# Altium PCB NG_0036526167_Diplomski-rad_PCB.PcbDoc (part 1 of 2)
Units mm, origin at the board's own origin, x right, y up, seen from the top; angles counter-clockwise.
Board outline 100 x 90 mm, 4 copper layers (Top Layer, GND1, GND2, Bottom Layer), stack 1.586 mm thick; 152 components, 97 nets, 539 pads, 128 vias.
Unrouted connection lines stored in the file: 99.
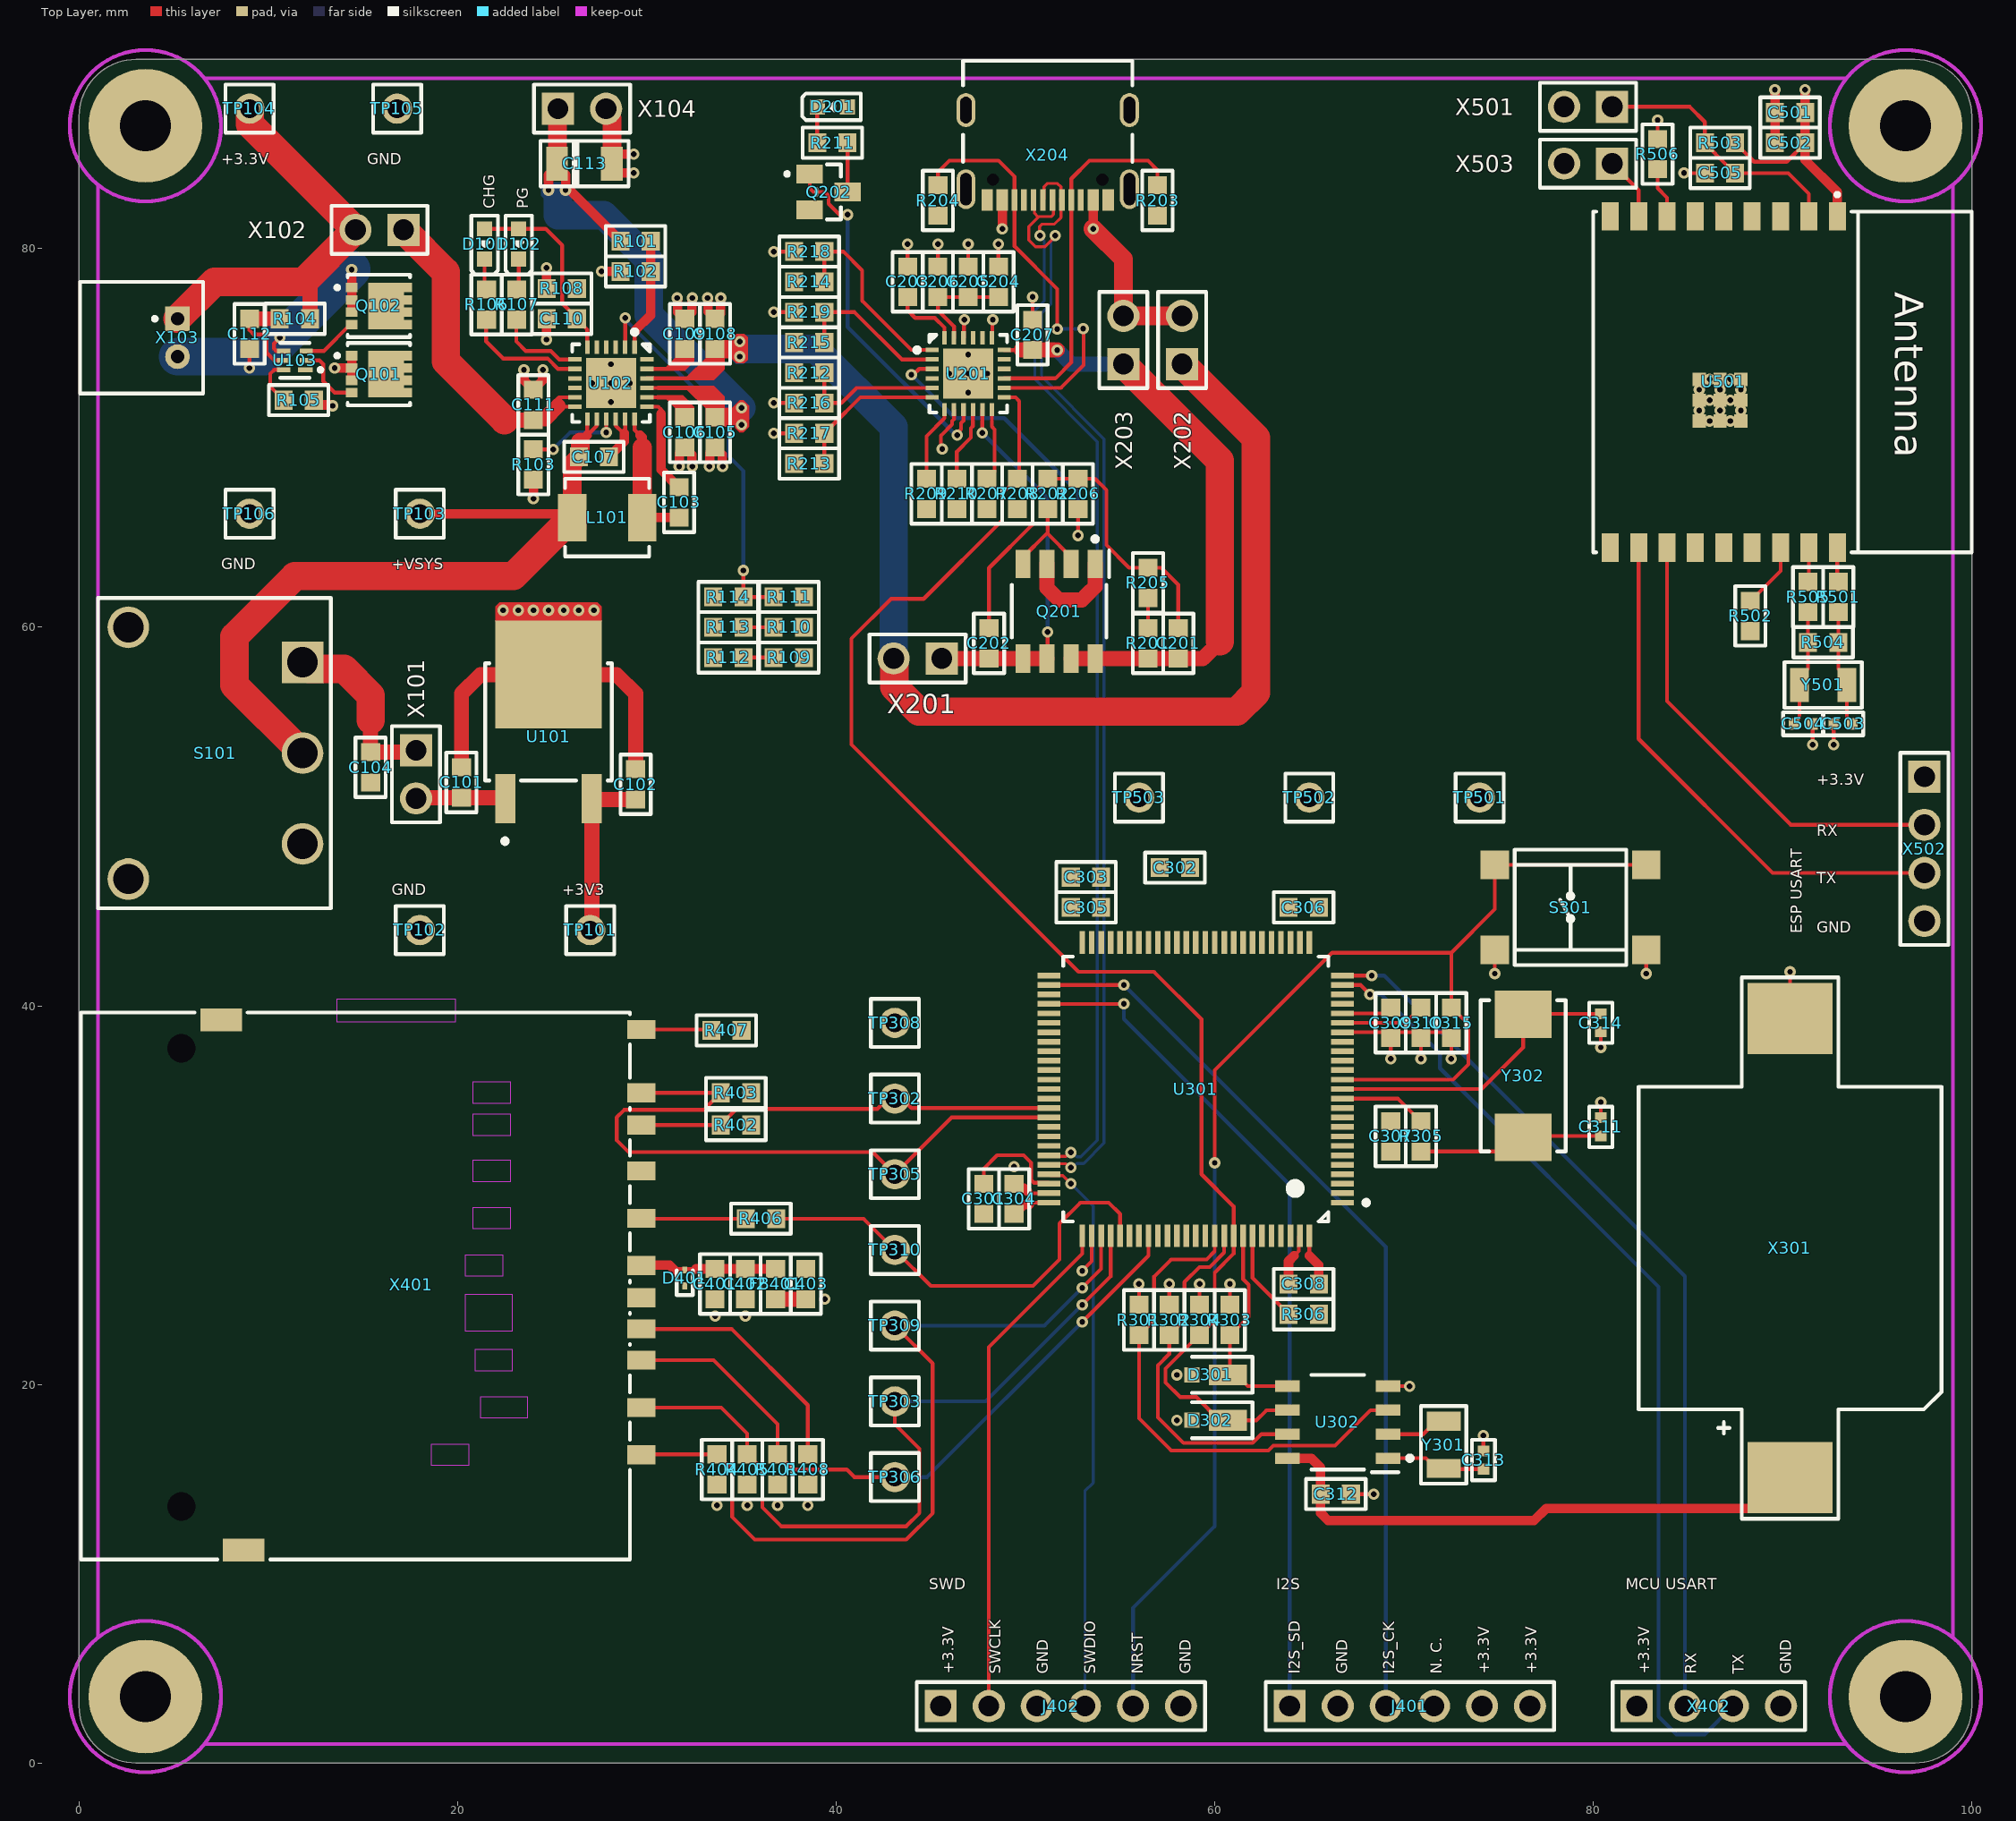
[diagram p0: Top Layer view]
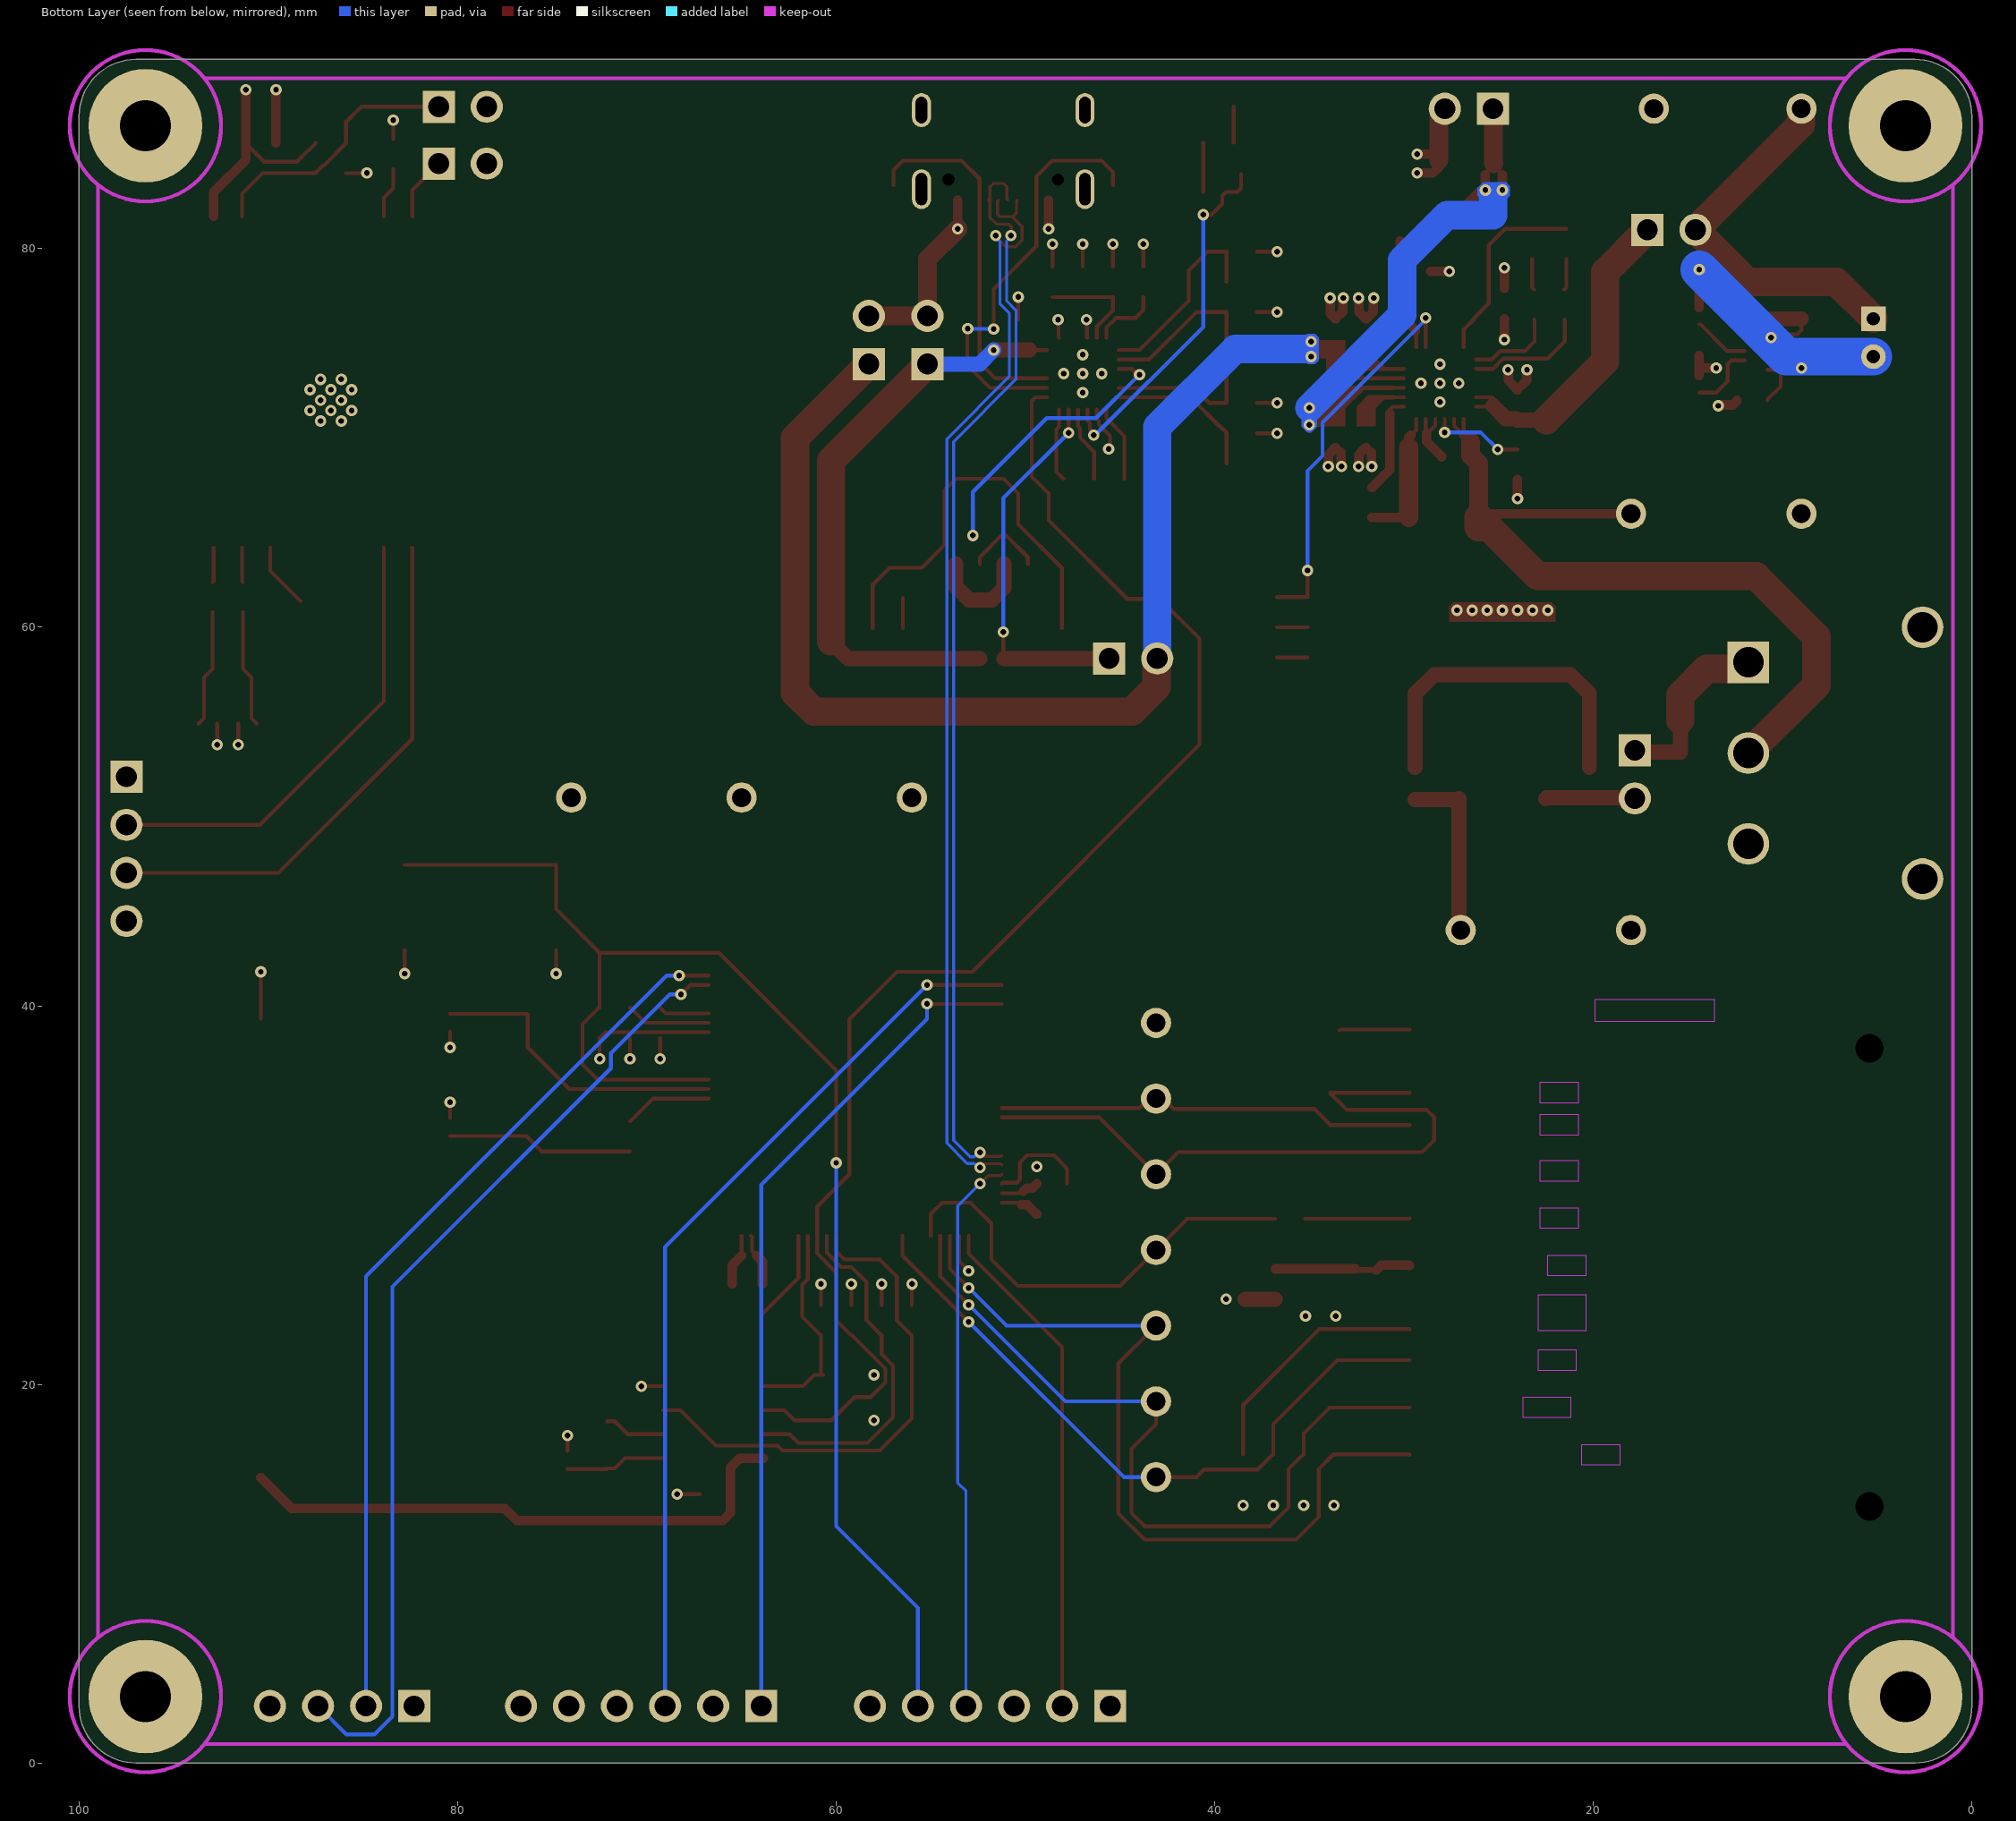
[diagram p1: Bottom Layer view, seen from below]
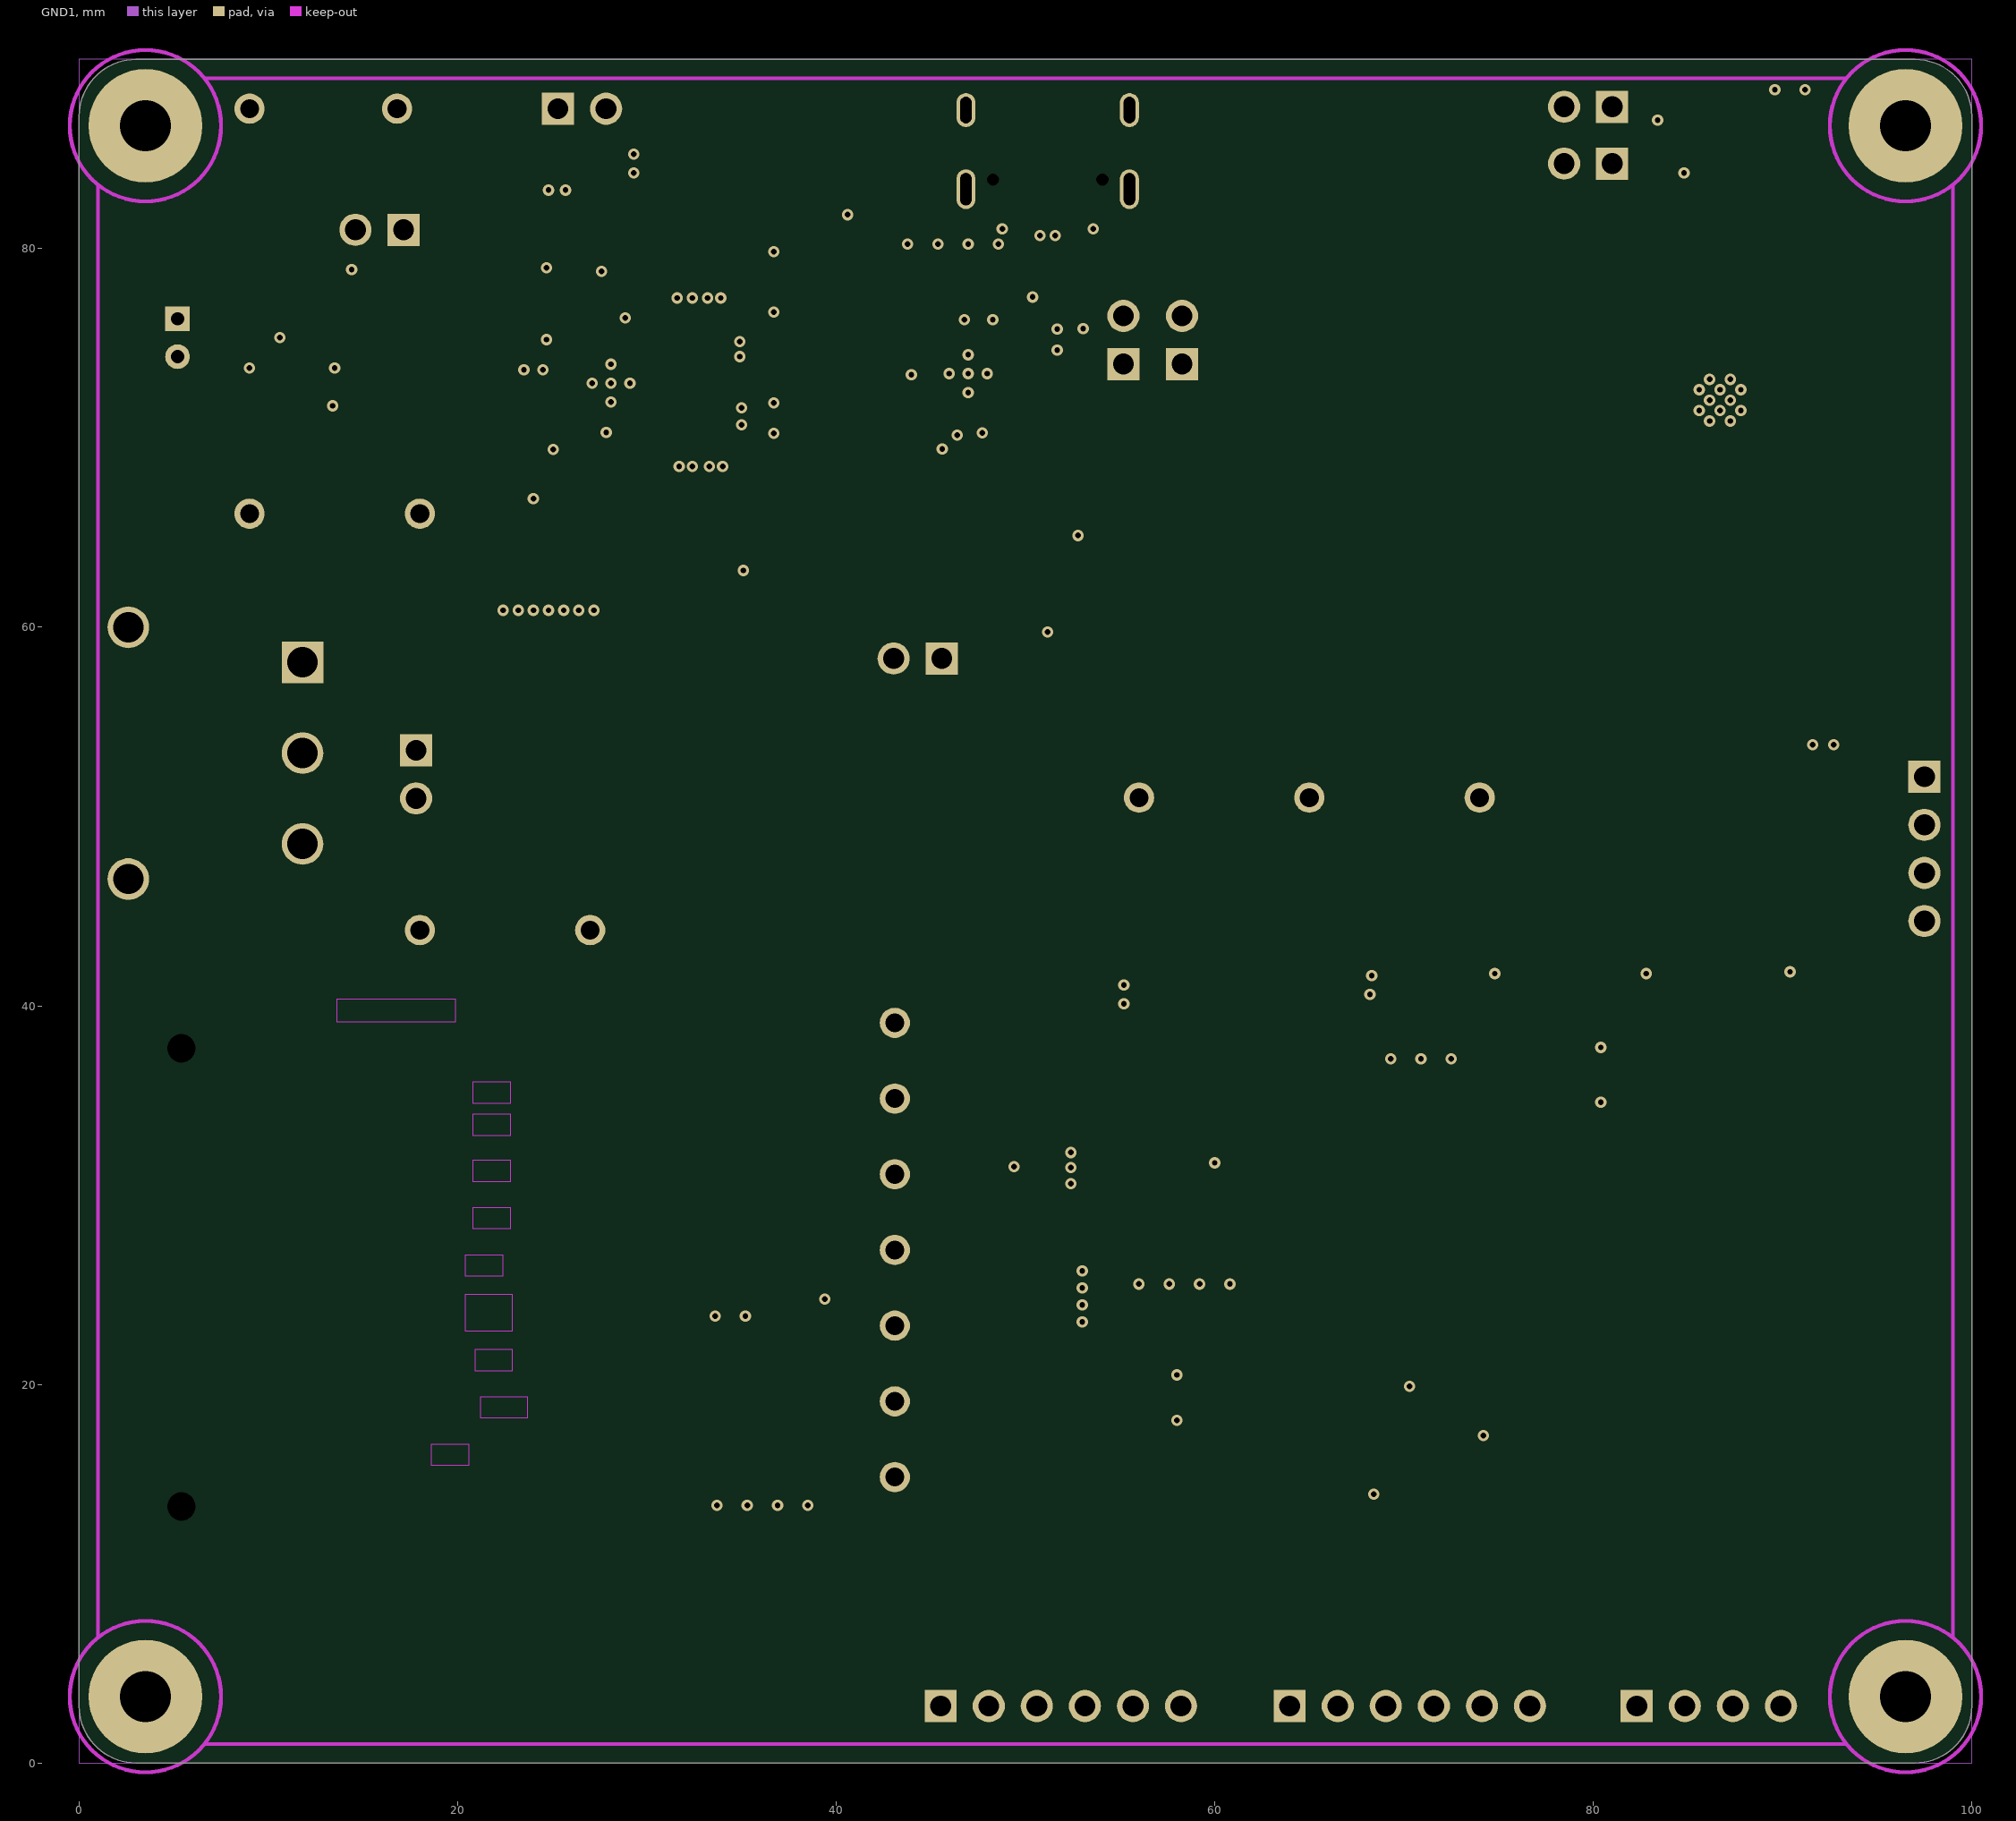
[diagram p2: GND1]
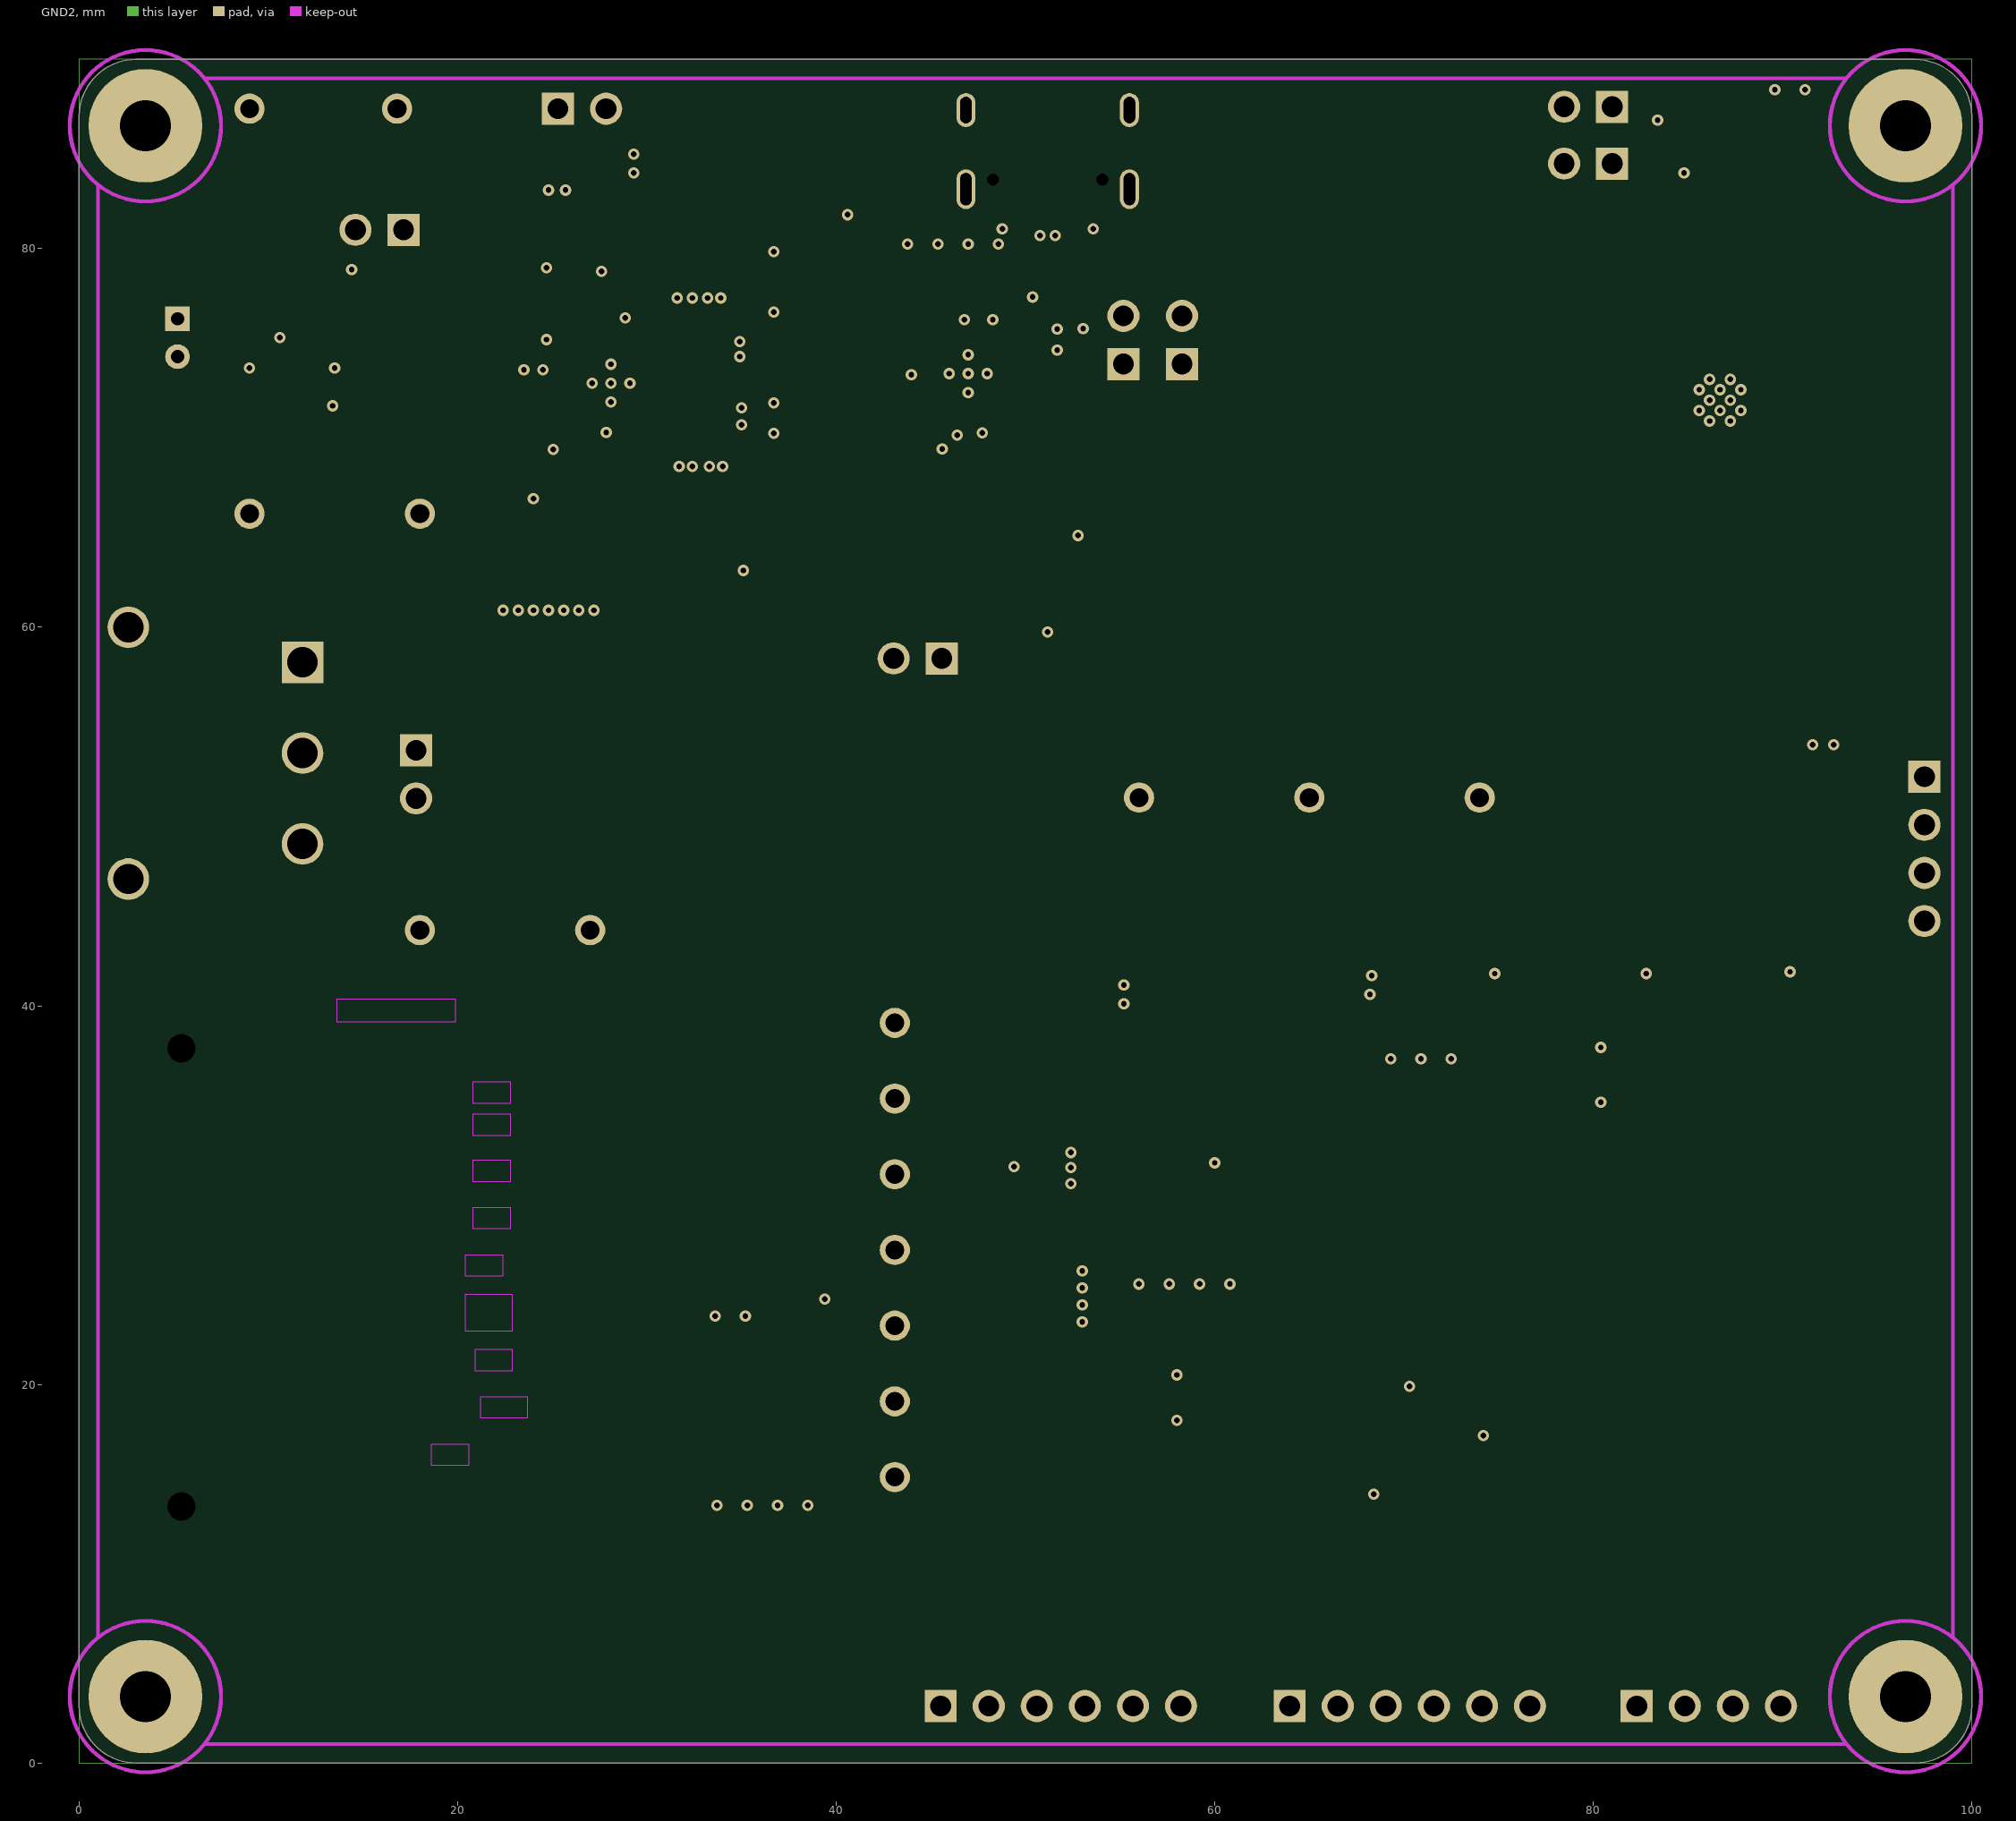
[diagram p3: GND2]
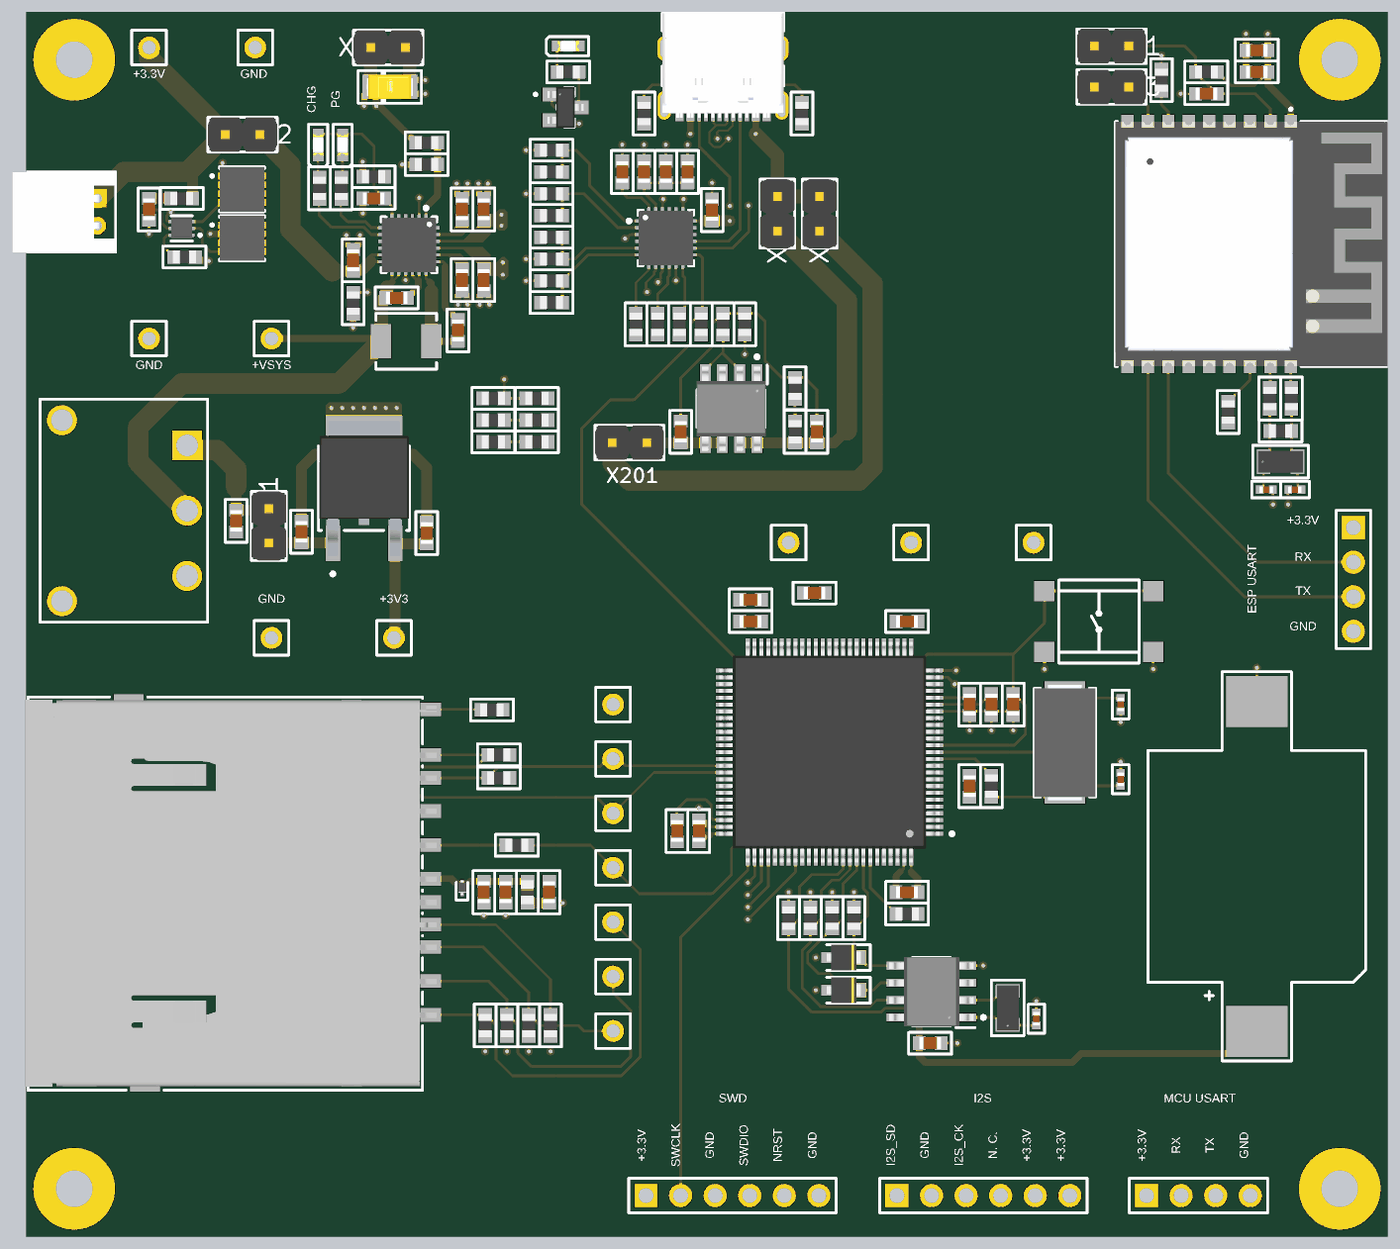
[diagram p5: 3D render of the assembled board from above, using the file's embedded part models]

## Layer stack, top to bottom
Top Solder: solder mask 0.0102, Solder Resist, Dk 0
Top Layer: signal copper 0.035
Dielectric 2: prepreg 0.2104, 7628*1, Dk 4.4
GND1: signal copper 0.0152
Dielectric 1: dielectric 1.065, FR-4, Dk 4.6
GND2: signal copper 0.0152
Dielectric 3: prepreg 0.2104, 7628*1, Dk 4.4
Bottom Layer: signal copper 0.035
Bottom Solder: solder mask 0.0102, Solder Resist, Dk 0

## Board outline
3,0 cw(c3,3) 0,3 0,87 cw(c3,87) 3,90 97,90 cw(c97,87) 100,87 100,3 cw(c97,3) 97,0

## Design rules (kind name [scope] priority, off if disabled: settings)
Clearance [All] p1: gap=0.2 ignorepadtopadclearanceinfootprint=FALSE except(0.127: SMDPad-SMDPad SMDPad-THPad SMDPad-Hole)
DiffPairsRouting [All] p1: maxlimit=0.254 minlimit=0.2 mostfreqgap=0.2 toplayer_minwidth=0.09 toplayer_maxwidth=0.381 toplayer_prefwidth=0.2 midlayer1_minwidth=0.09 midlayer1_maxwidth=0.381 midlayer1_prefwidth=0.2 midlayer2_minwidth=0.09 midlayer2_maxwidth=0.381 midlayer2_prefwidth=0.2 bottomlayer_minwidth=0.09 bottomlayer_maxwidth=0.381 bottomlayer_prefwidth=0.2 maxuncoupledlength=12.7
HoleSize ViaHoleSize [IsVia] p1: absolutevalues=TRUE maxlimit=0.6 minlimit=0.25 maxpercent=80.000 minpercent=20.000
HoleSize [All] p2: absolutevalues=TRUE maxlimit=6.3 minlimit=0.3 maxpercent=80.000 minpercent=20.000
HoleToHoleClearance ViaToViaClearance [IsVia vs IsVia] p1: gap=0.254 allowstackedmicrovias=TRUE
HoleToHoleClearance [All] p2: gap=0.5 allowstackedmicrovias=TRUE
MinimumAnnularRing MinimumAnnularRingVia [IsVia] p1: minimumring=0.1
MinimumAnnularRing [All] p2: minimumring=0.3
MinimumSolderMaskSliver [All] p1: minsoldermaskwidth=0.1
PolygonConnect [All] p1: connectstyle=Relief reliefconductorwidth=0.254 reliefentries=4 polygonreliefangle="90 Angle" airgapwidth=0.254
RoutingVias [All] p1: holewidth=0.45 width=0.3 viastyle="Through Hole" minholewidth=0.25 minwidth=0.15 maxholewidth=0.75 maxwidth=0.6
SilkToSilkClearance [All] p1: silktosilkclearance=0.2
SilkToSolderMaskClearance [IsPad] p1: minsilkscreentomaskgap=0.15 clearancetoexposedcopper=TRUE
SolderMaskExpansion [All] p1: expansion=0.038 istentingtop=FALSE
Width [All] p1: maxlimit=2 minlimit=0.09 preferedwidth=0.2
24 further rules are at their usual default settings.

## Classes and differential pairs
differential pair USB_OTG_FS: +USB_OTG_FS_P -USB_OTG_FS_N

## Components (designator, comment, footprint, x,y, rotation, side; value= is the part's Value field where it differs from the comment)
C101 "10u" CAPC0603 20.2,51.8 r270 top
C102 "10u" CAPC0603 29.4,51.7 r270 top
C103 "10n" CAPC0603 31.7,66.6 r270 top
C104 "47u" CAPC0603 15.4,52.6 r90 top
C105 "1u" CAPC0603 33.6,70.3 r90 top
C106 "4u7" CAPC0603 32,70.3 r90 top
C107 "10u" CAPC0603 27.2,69 r180 top
C108 "1u" CAPC0603 33.6,75.5 r270 top
C109 "4u7" CAPC0603 32,75.5 r270 top
C110 "1u" CAPC0603 25.5,76.3 r0 top
C111 "1u" CAPC0603 24,71.75 r270 top
C112 "100n" CAPC0603 9,75.5 r90 top
C113 "10u" CAPCP1206 26.7,84.5 r0 top
C201 "4u7" CAPC0603 58.075,59.15 r270 top
C202 "100n" CAPC0603 48.075,59.15 r270 top
C203 "1u" CAPC0603 43.775,78.25 r270 top
C204 "1u" CAPC0603 48.575,78.25 r270 top
C205 "100n" CAPC0603 46.975,78.25 r270 top
C206 "100n" CAPC0603 45.375,78.25 r270 top
C207 "3u3" CAPC0603 50.375,75.45 r270 top
C301 "2u2" CAPC0603 47.8,29.8 r90 top
C302 "2u2" CAPC0603 57.9,47.3 r180 top
C303 "4u7" CAPC0603 53.2,46.8 r180 top
C304 "100n" CAPC0603 49.4,29.8 r270 top
C305 "100n" CAPC0603 53.2,45.2 r180 top
C306 "100n" CAPC0603 64.7,45.2 r180 top
C307 "100n" CAPC0603 69.3,33.1 r90 top
C308 "100n" CAPC0603 64.7,25.3 r0 top
C309 "1u" CAPC0603 69.3,39.1 r90 top
C310 "100n" CAPC0603 70.9,39.1 r90 top
C311 "12p" CAPC0402 80.4,33.6 r270 top value=CAPC0402
C312 "100n" CAPC0603 66.4,14.2 r180 top
C313 "4p02" CAPC0402 74.2,16 r270 top value=CAPC0402
C314 "12p" CAPC0402 80.4,39.1 r90 top value=CAPC0402
C315 "100n" CAPC0603 72.5,39.1 r90 top
C401 "100n" CAPC0603 33.6,25.3 r90 top
C402 "2u2" CAPC0603 35.2,25.3 r90 top
C403 "C0603" CAPC0603 38.4,25.3 r270 top
C501 "10u" CAPC0603 90.4,87.2 r180 top
C502 "100n" CAPC0603 90.4,85.6 r180 top
C503 "12p" CAPC0402 93.2,54.9 r0 top value=CAPC0402
C504 "12p" CAPC0402 91.1,54.9 r180 top value=CAPC0402
C505 "1u" CAPC0603 86.7,84 r0 top
D101 "LTST-C194KGKT" LED0603 21.425,80.25 r90 top value=Green
D102 "LTST-C194KGKT" LED0603 23.225,80.25 r90 top value=Green
D201 "HL-PST-1608S9AC-04" LED0603 39.8,87.5 r0 top value=RED
D301 "PD3Z284C2V7-7" PowerDI323 59.75,20.5 r180 top
D302 "PD3Z284C2V7-7" PowerDI323 59.75,18.1 r180 top
D401 "ESD9B5.0ST5G" DIOC8060X37 32,25.62 r90 top
FB401 "120R" FBC0603 36.8,25.3 r270 top
J401 "HEADER6X1" HDR6W64P254_6X1_1524X254X1150 63.96,3 r90 top
J402 "HEADER6X1" HDR6W64P254_6X1_1524X254X1150 45.52,3 r90 top
L101 "2u2" INDM4145X18 27.9,65.8 r180 top value=2.2uH
Q101 "CSD16406Q3" TRANS_CSD16406Q3 15.835,73.375 r270 top
Q102 "CSD16406Q3" TRANS_CSD16406Q3 15.835,76.975 r270 top
Q201 "DMP3098LSD-13" SOIC127P620X175-8 51.775,60.85 r270 top
Q202 "BSS138" SOT190P240X290-3 39.6,83 r270 top
R101 "31k6" RESC0603 29.4,80.4 r180 top value=RES0603
R102 "10k" RESC0603 29.4,78.8 r180 top value=RES0603
R103 "160R" RESC0603 24,68.6 r270 top value=RES0603
R104 "330R" RESC0603 11.4,76.3 r0 top value=RES0603
R105 "2k2" RESC0603 11.6,72 r180 top value=RES0603
R106 "330R" RESC0603 21.525,77.05 r90 top value=RES0603
R107 "330R" RESC0603 23.125,77.05 r90 top value=RES0603
R108 "470R" RESC0603 25.5,77.9 r0 top value=RES0603
R109 "10k" RESC0603 37.5,58.4 r180 top value=RES0603
R110 "10k" RESC0603 37.5,60 r180 top value=RES0603
R111 "10k" RESC0603 37.5,61.6 r180 top value=RES0603
R112 "10k" RESC0603 34.3,58.4 r180 top value=RES0603
R113 "10k" RESC0603 34.3,60 r180 top value=RES0603
R114 "10k" RESC0603 34.3,61.6 r180 top value=RES0603
R201 "10k" RESC0603 56.475,59.15 r270 top value=RES0603
R202 "2k2" RESC0603 51.175,67.05 r270 top value=RES0603
R203 "5k1" RESC0603 56.975,82.55 r90 top value=RES0603
R204 "5k1" RESC0603 45.375,82.55 r90 top value=RES0603
R205 "10k" RESC0603 56.475,62.35 r270 top value=RES0603
R206 "2k2" RESC0603 52.775,67.049 r90 top value=RES0603
R207 "2k2" RESC0603 47.975,67.05 r270 top value=RES0603
R208 "2k2" RESC0603 49.575,67.05 r270 top value=RES0603
R209 "2k2" RESC0603 44.775,67.05 r270 top value=RES0603
R210 "2k2" RESC0603 46.375,67.05 r270 top value=RES0603
R211 "330R" RESC0603 39.8,85.6 r180 top value=RES0603
R212 "5k1" RESC0603 38.575,73.45 r180 top value=RES0603
R213 "5k1" RESC0603 38.575,68.65 r180 top value=RES0603
R214 "0R0" RESC0603 38.575,78.25 r180 top value=RES0603
R215 "0R0" RESC0603 38.575,75.05 r180 top value=RES0603
R216 "1k" RESC0603 38.575,71.85 r0 top value=RES0603
R217 "2k4" RESC0603 38.575,70.25 r0 top value=RES0603
R218 "0R0" RESC0603 38.575,79.85 r0 top value=RES0603
R219 "0R0" RESC0603 38.575,76.65 r0 top value=RES0603
R301 "2k2" RESC0603 56,23.4 r90 top value=RES0603
R302 "2k2" RESC0603 57.6,23.4 r90 top value=RES0603
R303 "2k2" RESC0603 60.8,23.4 r90 top value=RES0603
R304 "2k2" RESC0603 59.2,23.4 r90 top value=RES0603
R305 "0R0" RESC0603 70.9,33.1 r90 top value=RES0603
R306 "10k" RESC0603 64.7,23.7 r180 top value=RES0603
R401 "10k" RESC0603 36.9,15.5 r270 top value=RES0603
R402 "10k" RESC0603 34.7,33.7 r0 top value=RES0603
R403 "10k" RESC0603 34.7,35.4 r0 top value=RES0603
R404 "10k" RESC0603 33.7,15.5 r270 top value=RES0603
R405 "10k" RESC0603 35.3,15.5 r270 top value=RES0603
R406 "49R9" RESC0603 36.025,28.75 r180 top value=RES0603
R407 "DNP" RESC0603 34.2,38.7 r180 top value=RES0603
R408 "1M" RESC0603 38.5,15.5 r90 top value=RES0603
R501 "0R" RESC0603 92.95,61.6 r90 top value=RES0603
R502 "10k" RESC0603 88.3,60.6 r270 top value=RES0603
R503 "10k" RESC0603 86.7,85.6 r0 top value=RES0603
R504 "DNP" RESC0603 92.15,59.2 r180 top value=RES0603
R505 "0R" RESC0603 91.35,61.6 r90 top value=RES0603
R506 "10k" RESC0603 83.4,85 r90 top value=RES0603
S101 "SS-12D11L3" SW_SS-12D11L3 11.8,58.15 r270 top
S301 "SPST" SW_TSA063G60-250 78.8,45.2 r0 top value=TSA063G60-250
TP101 "TP" TESTPOINT 27,44 r90 top value=5001
TP102 "TP" TESTPOINT 18,44 r90 top value=5001
TP103 "TP" TESTPOINT 18,66 r90 top value=5001
TP104 "TP" TESTPOINT 9,87.4 r90 top value=5001
TP105 "TP" TESTPOINT 16.8,87.4 r90 top value=5001
TP106 "TP" TESTPOINT 9,66 r90 top value=5001
TP302 "TP" TESTPOINT 43.1,35.1 r90 top value=5001
TP303 "TP" TESTPOINT 43.1,19.1 r90 top value=5001
TP305 "TP" TESTPOINT 43.1,31.1 r90 top value=5001
TP306 "TP" TESTPOINT 43.1,15.1 r90 top value=5001
TP308 "TP" TESTPOINT 43.1,39.1 r90 top value=5001
TP309 "TP" TESTPOINT 43.1,23.1 r90 top value=5001
TP310 "TP" TESTPOINT 43.1,27.1 r0 top value=5001
TP501 "TP" TESTPOINT 74,51 r90 top value=5001
TP502 "TP" TESTPOINT 65,51 r90 top value=5001
TP503 "TP" TESTPOINT 56,51 r90 top value=5001
U101 "AP7363-33D-13" TO457X991X229-3 24.8,55 r0 top
U102 "BQ24166RGER" QFN50P410X410X100-24EP 28.1,72.9 r270 top
U103 "BQ29700DSER" WSON50P150X150X80-6 11.4,74.1 r180 top
U201 "CYPD3177-24LQXQT" QFN50P410X410X100-24EP 46.975,73.4 r0 top
U301 "STM32F746VGT6" QFP50P1600X1600X160-100 59,35.6 r180 top
U302 "PCF8563T/5,518" SOIC127P610X175-8 66.5,18 r180 top
U501 "ESP32-C3-WROOM-02-N4" ESP32-C3-WROOM-02-N4 86.9,72.96 r270 top
X101 "HEADER2X1" HDRV2W64P254_2X1_508X254X1150 17.8,53.5 r270 top value=X6521WV-2x01H-C60D30
X102 "HEADER2X1" HDRV2W64P254_2X1_508X254X1150 17.14,81 r180 top value=X6521WV-2x01H-C60D30
X103 "S2B-PH-K-S" JST_S2B-PH-K-S 5.2,76.3 r180 top
X104 "HEADER2X1" HDRV2W64P254_2X1_508X254X1150 25.3,87.4 r0 top value=X6521WV-2x01H-C60D30
X201 "HEADER2X1" HDRV2W64P254_2X1_508X254X1150 45.576,58.351 r180 top value=X6521WV-2x01H-C60D30
X202 "HEADER2X1" HDRV2W64P254_2X1_508X254X1150 58.275,73.91 r90 top value=X6521WV-2x01H-C60D30
X203 "HEADER2X1" HDRV2W64P254_2X1_508X254X1150 55.175,73.91 r90 top value=X6521WV-2x01H-C60D30
X204 "HC-TYPE-C-16P-01A-R" GCT_USB4105-GF-A 51.175,86.075 r180 top
X301 "CR1632" BAT_BS-16-B4AA006-R 90.4,27.2 r270 top value=BS-16-B4AA006-R
X401 "10067847-001RLF" SD_10067847-001RLF 20.325,25.65 r270 top
X402 "HEADER4X1" HDRV4W64P254_4X1_1016X254X1150 82.3,3 r0 top value=4X1
X501 "HEADER2X1" HDRV2W64P254_2X1_508X254X1150 81,87.5 r180 top value=X6521WV-2x01H-C60D30
X502 "HEADER4X1" HDRV4W64P254_4X1_1016X254X1150 97.5,52.1 r270 top value=4X1
X503 "HEADER2X1" HDRV2W64P254_2X1_508X254X1150 81,84.5 r180 top value=X6521WV-2x01H-C60D30
Y301 "32.768kHz" XTAL320X150X80 72.1,16.8 r90 top
Y302 "8MHz" XTAL800X450X180 76.3,36.3 r270 top
Y501 "32.768kHz" XTAL320X150X80 92.15,56.95 r0 top

## Footprints (in the part's own frame and the unit in brackets; to place one, negate y for a bottom-side part, rotate by r counter-clockwise, add the part's x,y. Pads: shape width x height; smd on the part's side, far side on the other; paste and mask are expansions set on the pad)
BAT_BS-16-B4AA006-R [mm] "Generic description"
  rect 3.75x4.5 smd mask+0.05: 1(12.125,0) 2(-12.125,0)
  silkscreen extent -14.3,-8 14.3,8
CAPC0402 [mm]
  rect 0.57x0.62 smd mask+0.05: 1(-0.48,0) 2(0.48,0)
  silkscreen extent -1.06,-0.61 1.06,0.61, body extent -0.5,-0.25 0.5,0.25, height 0.55
CAPC0603 [mm]
  rect 0.95x1 smd mask+0.05: 1(-0.8,0) 2(0.8,0)
  silkscreen extent -1.58,-0.8 1.58,0.8, body extent -0.8,-0.45 0.8,0.45, height 0.8
CAPCP1206 [mm] "Generic description"
  rect 1.15x1.8 smd mask+0.05: 1(-1.45,0) 2(1.45,0)
  silkscreen extent -2.32,-1.2 2.32,1.2, body extent -1.7,-0.9 1.7,0.9, height 1.81
DIOC8060X37 [mm] "SOD-923"
  rect 0.36x0.25 smd mask+0.05: 1(-0.42,0) 2(0.42,0)
  silkscreen extent -0.9,-0.43 0.4,0.43, body extent -0.5,-0.3 0.5,0.3, height 0.4
ESP32-C3-WROOM-02-N4 [mm] "Footprint for ESP32-C3-WROOM-02-N4 modem"
  rect 1.5x0.9 smd mask+0.05: 1(-8.75,6) 2(-8.75,4.5) 3(-8.75,3) 4(-8.75,1.5) 5(-8.75,0) 6(-8.75,-1.5) 7(-8.75,-3) 8(-8.75,-4.5) 9(-8.75,-6) 10(8.75,-6) 11(8.75,-4.5) 12(8.75,-3) 13(8.75,-1.5) 14(8.75,0) 15(8.75,1.5) 16(8.75,3) 17(8.75,4.5) 18(8.75,6)
  rect 0.7x0.7 smd mask+0.05: 19(-0.14,0.9) 19(-0.14,-0.2) 19(-0.14,-1.3) 19(0.96,0.9) 19(0.96,-0.2) 19(0.96,-1.3) 19(2.06,-0.2) 19(2.06,0.9) 19(2.06,-1.3)
  Top Layer pour cut-out: -9,7.1 9,7.1 9,13.1 -9,13.1
  GND1 pour cut-out: -9,7.1 9,7.1 9,13.1 -9,13.1
  GND2 pour cut-out: -9,7.1 9,7.1 9,13.1 -9,13.1
  Bottom Layer pour cut-out: -9,7.1 9,7.1 9,13.1 -9,13.1
  silkscreen extent -10,-6.9 9,13.1, body extent -9,-6.9 9,13.1, height 3.35
FBC0603 [mm]
  rect 0.95x1 smd mask+0.05: 1(-0.8,0) 2(0.8,0)
  silkscreen extent -1.58,-0.8 1.58,0.8, body extent -0.88,-0.47 0.88,0.47, height 0.94
GCT_USB4105-GF-A [mm] "CONN USB 2.0 TYPE C"
  round 0.5 hole 0.65 unplated mask+0.102: 0(-2.89,2.428) 0(2.89,2.428)
  oval 1x1.8 hole 0.6 slot 1.4 at 90 deg mask+0.05: 1(-4.32,-1.252) 1(4.32,-1.252)
  oval 1x2.1 hole 0.6 slot 1.7 at 90 deg mask+0.05: 1(-4.32,2.927) 1(4.32,2.927)
  rect 0.6x1.15 smd mask+0.05: A1-B12(-3.2,3.503) A4-B9(-2.4,3.503) B1-A12(3.2,3.503) B4-A9(2.4,3.503)
  rect 0.3x1.15 smd mask+0.05: A5(-1.25,3.503) A6(-0.25,3.503) A7(0.25,3.503) A8(1.25,3.503) B5(1.75,3.503) B6(0.75,3.503) B7(-0.75,3.503) B8(-1.75,3.503)
  silkscreen extent -4.47,-3.85 4.47,1.48, body extent -4.47,-3.85 4.47,3.85, height 3.26
HDR6W64P254_6X1_1524X254X1150 [mm] "Pin header 6X1 right angle"
  rect 1.7x1.7 hole 1.1 mask+0.05: 1(0,0)
  round 1.7 hole 1.1 mask+0.05: 2(0,-2.54) 3(0,-5.08) 4(0,-7.62) 5(0,-10.16) 6(0,-12.7)
  silkscreen extent -1.27,-13.97 1.27,1.27
HDRV2W64P254_2X1_508X254X1150 [mm] "Generic description"
  rect 1.7x1.7 hole 1.1 mask+0.05: 1(0,0)
  round 1.7 hole 1.1 mask+0.05: 2(2.54,0)
  silkscreen extent -1.27,-1.27 3.81,1.27, body extent -1.27,-1.27 3.81,1.27, height 8.54
HDRV4W64P254_4X1_1016X254X1150 [mm] "Generic description"
  rect 1.7x1.7 hole 1.1 mask+0.05: 1(0,0)
  round 1.7 hole 1.1 mask+0.05: 2(2.54,0) 3(5.08,0) 4(7.62,0)
  silkscreen extent -1.27,-1.27 8.89,1.27
INDM4145X18 [mm]
  rect 1.5x2.5 smd mask+0.05: 1(-1.85,0) 2(1.85,0)
  silkscreen extent -2.22,-2.05 2.22,2.05
JST_S2B-PH-K-S [mm] "Generic description"
  rect 1.3x1.3 hole 0.7 mask+0.05: 1(0,0)
  round 1.3 hole 0.7 mask+0.05: 2(0,2)
  silkscreen extent -1.35,-1.95 5.15,3.95, body extent -1.35,-1.95 6.25,3.95, height 4.8
LED0603 [mm] "0603 Footprint for Light Emitting diodes"
  rect 0.8x0.8 smd mask+0.05: 1(-0.8,0) 2(0.8,0)
  silkscreen extent -1.6,-0.7 1.5,0.7, body extent -0.8,-0.4 0.8,0.4, height 0.7
PowerDI323 [mm] "PowerDI323"
  rect 2x1.1 smd paste-0.025 mask+0.05: 1(-0.95,0)
  rect 0.8x0.8 smd mask+0.05: 2(0.95,0)
  silkscreen extent -2.25,-0.95 0.95,0.95, body extent -1.55,-0.95 0.95,0.95, height 0.65
QFN50P410X410X100-24EP [mm] "Generic description"
  rect 0.7x0.24 smd mask+0.05: 1(-1.9,1.25) 2(-1.9,0.75) 3(-1.9,0.25) 4(-1.9,-0.25) 5(-1.9,-0.75) 6(-1.9,-1.25) 13(1.9,-1.25) 14(1.9,-0.75) 15(1.9,-0.25) 16(1.9,0.25) 17(1.9,0.75) 18(1.9,1.25)
  rect 0.24x0.7 smd mask+0.05: 7(-1.25,-1.9) 8(-0.75,-1.9) 9(-0.25,-1.9) 10(0.25,-1.9) 11(0.75,-1.9) 12(1.25,-1.9) 19(1.25,1.9) 20(0.75,1.9) 21(0.25,1.9) 22(-0.25,1.9) 23(-0.75,1.9) 24(-1.25,1.9)
  rect 2.65x2.65 smd paste-2539.97 mask+0.05: 25(0,0)
  silkscreen extent -2.8,-2.05 2.05,2.05, body extent -2,-2 2,2, height 1
QFP50P1600X1600X160-100 [mm] "Low-profile quad flat package, 100 pins"
  rect 1.2x0.3 smd mask+0.05: 1(-7.75,6) 2(-7.75,5.5) 3(-7.75,5) 4(-7.75,4.5) 5(-7.75,4) 6(-7.75,3.5) 7(-7.75,3) 8(-7.75,2.5) 9(-7.75,2) 10(-7.75,1.5) 11(-7.75,1) 12(-7.75,0.5) 13(-7.75,0) 14(-7.75,-0.5) 15(-7.75,-1) 16(-7.75,-1.5) 17(-7.75,-2) 18(-7.75,-2.5) 19(-7.75,-3) 20(-7.75,-3.5) 21(-7.75,-4) 22(-7.75,-4.5) 23(-7.75,-5) 24(-7.75,-5.5) 25(-7.75,-6) 51(7.75,-6) 52(7.75,-5.5) 53(7.75,-5) 54(7.75,-4.5) 55(7.75,-4) 56(7.75,-3.5) 57(7.75,-3) 58(7.75,-2.5) 59(7.75,-2) 60(7.75,-1.5) 61(7.75,-1) 62(7.75,-0.5) 63(7.75,0) 64(7.75,0.5) 65(7.75,1) 66(7.75,1.5) 67(7.75,2) 68(7.75,2.5) 69(7.75,3) 70(7.75,3.5) 71(7.75,4) 72(7.75,4.5) 73(7.75,5) 74(7.75,5.5) 75(7.75,6)
  rect 0.3x1.2 smd mask+0.05: 26(-6,-7.75) 27(-5.5,-7.75) 28(-5,-7.75) 29(-4.5,-7.75) 30(-4,-7.75) 31(-3.5,-7.75) 32(-3,-7.75) 33(-2.5,-7.75) 34(-2,-7.75) 35(-1.5,-7.75) 36(-1,-7.75) 37(-0.5,-7.75) 38(0,-7.75) 39(0.5,-7.75) 40(1,-7.75) 41(1.5,-7.75) 42(2,-7.75) 43(2.5,-7.75) 44(3,-7.75) 45(3.5,-7.75) 46(4,-7.75) 47(4.5,-7.75) 48(5,-7.75) 49(5.5,-7.75) 50(6,-7.75) 76(6,7.75) 77(5.5,7.75) 78(5,7.75) 79(4.5,7.75) 80(4,7.75) 81(3.5,7.75) 82(3,7.75) 83(2.5,7.75) 84(2,7.75) 85(1.5,7.75) 86(1,7.75) 87(0.5,7.75) 88(0,7.75) 89(-0.5,7.75) 90(-1,7.75) 91(-1.5,7.75) 92(-2,7.75) 93(-2.5,7.75) 94(-3,7.75) 95(-3.5,7.75) 96(-4,7.75) 97(-4.5,7.75) 98(-5,7.75) 99(-5.5,7.75) 100(-6,7.75)
  silkscreen extent -9.1,-7 7,7, body extent -8.1,-8.1 8.1,8.1, height 1.6
RESC0603 [mm] "Generic description"
  rect 0.95x1 smd mask+0.05: 1(-0.8,0) 2(0.8,0)
  silkscreen extent -1.58,-0.8 1.58,0.8, body extent -0.85,-0.47 0.85,0.47, height 0.56
SD_10067847-001RLF [mm] "SD card connector"
  round 1 hole 1.5 unplated: 0(-12.1,-14.925) 0(12.1,-14.925)
  rect 1x1.5 smd mask+0.05: 1(6.875,9.375) 2(4.375,9.375) 3(1.075,9.375) 4(-0.625,9.375) 5(-3.125,9.375) 6(-5.625,9.375) 7(-8.05,9.375) 8(-9.75,9.375) 9(9.375,9.375) 10(2.725,9.375) 11(-13.1,9.375)
  rect 1.2x2.2 smd mask+0.05: 12(-13.6,-12.825) 13(14.4,-11.625)
  Keep-Out Layer region: -10.31,0.475 -9.21,0.475 -9.21,2.475 -10.31,2.475
  Keep-Out Layer region: -8.61,0.475 -7.51,0.475 -7.51,2.475 -8.61,2.475
  Keep-Out Layer region: -6.18,0.475 -5.08,0.475 -5.08,2.475 -6.18,2.475
  Keep-Out Layer region: -3.68,0.475 -2.58,0.475 -2.58,2.475 -3.68,2.475
  Keep-Out Layer region: -1.18,0.075 -0.08,0.075 -0.08,2.075 -1.18,2.075
  Keep-Out Layer region: 3.82,0.575 4.92,0.575 4.92,2.575 3.82,2.575
  Keep-Out Layer region: 6.32,0.875 7.42,0.875 7.42,3.375 6.32,3.375
  Keep-Out Layer region: -14.7,-6.725 -13.5,-6.725 -13.5,-0.425 -14.7,-0.425
  Keep-Out Layer region: 8.82,-1.725 9.92,-1.725 9.92,0.275 8.82,0.275
  Keep-Out Layer region: 0.92,0.075 2.82,0.075 2.82,2.575 0.92,2.575
  silkscreen extent -14,-20.22 14.9,8.77, body extent -13.8,-20.42 14.65,9.83, height 2.9
SOIC127P610X175-8 [mm] "Generic description"
  rect 1.3x0.6 smd mask+0.05: 1(-2.65,1.905) 2(-2.65,0.635) 3(-2.65,-0.635) 4(-2.65,-1.905) 5(2.65,-1.905) 6(2.65,-0.635) 7(2.65,0.635) 8(2.65,1.905)
  silkscreen extent -3.91,-2.5 1.4,2.65, body extent -3.1,-2.54 3.1,2.54, height 1.76
SOIC127P620X175-8 [mm] "Generic description"
  rect 1.505x0.802 smd mask+0.05: 1(-2.498,1.905) 2(-2.498,0.635) 3(-2.498,-0.635) 4(-2.498,-1.905) 5(2.498,-1.905) 6(2.498,-0.635) 7(2.498,0.635) 8(2.498,1.905)
  silkscreen extent -3.91,-2.5 1.4,2.65, body extent -3.1,-2.54 3.1,2.54, height 1.76
SOT190P240X290-3 [mm] "Generic description"
  rect 1x1.4 smd mask+0.05: 1(-0.95,-1) 2(0.95,-1) 3(0,1)
  silkscreen extent -1.45,-2.3 1.45,0.65, body extent -1.52,-1.32 1.52,1.32, height 1.12
SW_SS-12D11L3 [mm] "Generic description"
  round 2.2 hole 1.6 mask+0.05: 0(-1.85,-9.2) 0(11.45,-9.2) 2(4.8,0) 3(9.6,0)
  rect 2.2x2.2 hole 1.6 mask+0.05: 1(0,0)
  silkscreen extent -3.4,-10.8 13,1.5
SW_TSA063G60-250 [mm] "TACT SW TSA063G60-250"
  rect 1.5x1.5 smd mask+0.05: 1(-4,2.25) 2(4,2.25) 3(-4,-2.25) 4(4,-2.25)
  silkscreen extent -2.95,-3.05 2.95,3.05
TESTPOINT [mm] "Generic description"
  round 1.6 hole 1 mask+0.05: 1(0,0)
  silkscreen extent -1.27,-1.27 1.27,1.27
TO457X991X229-3 [mm] "Generic description"
  rect 1.06x2.6 smd mask+0.05: 1(-2.286,-4.05) 3(2.286,-4.05)
  rect 5.632x5.7 smd mask+0.05: 2(0,2.5)
  silkscreen extent -3.35,-6.4 3.35,3.1, body extent -3.29,-4.97 3.29,4.95, height 2.29
TRANS_CSD16406Q3 [mm] "VSON-CLIP"
  rect 0.5x0.63 smd paste-2539.97 mask+0.05: 1(-0.975,-1.435) 1(-0.325,-1.435) 1(0.325,-1.435) 2(-0.975,1.435) 2(-0.325,1.435) 2(0.325,1.435) 2(0.975,1.435) 3(0.975,-1.435)
  rect 2.45x1.9 smd paste-2539.97 mask+0.05: 2(0,0.39)
  silkscreen extent -1.65,-2.3 1.65,1.65, body extent -1.65,-1.65 1.65,1.65, height 1.1
WSON50P150X150X80-6 [mm] "Generic description"
  rect 0.8x0.25 smd mask+0.05: 1(-0.55,0.5)
  rect 0.7x0.25 smd mask+0.05: 2(-0.6,0) 3(-0.6,-0.5) 4(0.6,-0.5) 5(0.6,0) 6(0.6,0.5)
  silkscreen extent -1.45,-0.92 0.77,0.92, body extent -0.75,-0.75 0.75,0.75, height 0.77
XTAL320X150X80 [mm] "Generic description"
  rect 1x1.8 smd: 1(-1.25,0) 2(1.25,0)
  silkscreen extent -2.05,-1.2 2.05,1.2, body extent -1.65,-0.8 1.65,0.8, height 0.89
XTAL800X450X180 [mm] "Generic description"
  rect 2.5x3 smd mask+0.05: 1(-3.25,0) 2(3.25,0)
  silkscreen extent -4,-2.25 4,2.25, body extent -4.25,-2.25 4.25,2.25, height 2.1

## Part data
C101 C102 C103 C104 C105 C106 C107 C108 C109 C110 C111 C112 C201 C202 C203 C204 C205 C206 C207 C301 C302 C303 C304 C305 C306 C307 C308 C309 C310 C312 C315 C401 C402 C403 C501 C502 C505: library part CAPC0603, "Ceramic capacitor, VAL?,  VOL?, DIEL?", Case=0603, MFR=?, Checked=Yes, MFRN=?, SPN=?, Supplier=Digi-Key
C113: library part CAPCP1206-10u-10, "Tantalum capacitor, 10uF,  10V, 3.8Ohm", Case=1206, MFR=KEMET, MFRN=T491A106K010AT, Checked=Yes, SPN=399-3684-2-ND, Supplier=Digi-Key
C311 C313 C314 C503 C504: library part CAPC0402, "Ceramic capacitor, VAL?,  VOL?, DIEL?", Case=0402, MFR=?, Checked=Yes, MFRN=?, SPN=?, Supplier=Digi-Key
D101 D102: "LED Green, 2.1V, 20mA", Case=0603, MFR=Lite-On, Checked=Yes, MFRN=LTST-C194KGKT, SPN=C913102, Supplier=JLCPCB
D201: "LED Red, 2.3V, 20mA", Case=0603, MFR=HONGLITRONIC, Checked=Yes, MFRN=HL-PST-1608S9AC-04, SPN=C497931, Supplier=JLCPCB
D301 D302: "Zener Dioode, 2.7V, 500mW", Case=SOD323F, MFR="Diodes Incorporated", Checked=Yes, MFRN=PD3Z284C2V7-7, SPN=C531171, Supplier=JLCPCB
D401: library part "TVS DIODE ESD9B5.0ST5G", "TVS ZENER DIODE 5VWM", Case=SOD-923, MFR=onsemi, Checked=Yes, MFRN=ESD9B5.0ST5G, SPN=ESD9B5.0ST5GOSTR-ND, Supplier=Digi-Key
FB401: library part FB0603-120R, "Ferrite bead, 120R@100MHz", Case=0603, MFR=?, Checked=Yes, MFRN=?, SPN=?, Supplier=Digi-Key
J401 J402: "Pin header, 6x1, 100mil pitch", Case=6X1, MFR=DEALON, MFRN=DZ254R-11-06-63, Checked=Yes, SPN=C2935912, Supplier=JLCPCB
L101: library part INDM4145-2u2-20, "Inductor 2.2uH, 4A, ±20%, 41mOhm", Case=4.1x4.5mm, MFR=KOHERelec, MFRN=MDA4020-2R2M, Checked=Yes, SPN=C2847469, Supplier=JLCPCB
Q101 Q102: "MOSFET N-CH 25V 60A 8VSON", Case=8-VSON-CLIP, MFR="Texas Instruments", Checked=Yes, MFRN=CSD16406Q3, SPN=C2861720, Supplier=JLCPCB
Q201: "MOSFET 2P-CH 30V 4.4A 8-SOIC", Case=8-SOIC, MFR="Diodes Incorporated", Checked=Yes, MFRN=DMP3098LSD-13, SPN=C531177, Supplier=JLCPCB
Q202: "MOSFET N-CH 50V 220MA SOT23-3", Case=SOT23-3, MFR=onsemi, Checked=Yes, MFRN=BSS138, SPN=C52895, Supplier=JLCPCB
R101 R102 R103 R104 R105 R106 R107 R108 R109 R110 R111 R112 R113 R114 R201 R202 R203 R204 R205 R206 R207 R208 R209 R210 R211 R212 R213 R214 R215 R216 R217 R218 R219 R301 R302 R303 R304 R305 R306 R401 R402 R403 R404 R405 R406 R407 R408 R501 R502 R503 R504 R505 R506: library part RES0603, "Thick film resistor, VAL?, POW?", Case=0603, MFR=?, Checked=Yes, MFRN=?, SPN=?, Supplier=Digi-Key
S101: library part "SLIDE SW SPDT", "Slide switch, SPDT, 125V, 3A", Case=SPDT, MFR="XKB Connection", Checked=Yes, MFRN=SS-12D11L3, SPN=C843366, Supplier=JLCPCB
S301: library part "TACT SW", "TACT SW, SPST, NO", Case=SW_TSA063G60-250, MFR=BRIGHT, MFRN=TSA063G60-250, Checked=Yes, SPN=C294566, Supplier=JLCPCB
TP101 TP102 TP103 TP104 TP105 TP106 TP302 TP303 TP305 TP306 TP308 TP309 TP310 TP501 TP502 TP503: library part TESTPOINT, "Testpoint", Case=Thimble, MFR=Keystone, MFRN=5001, Checked=Yes, SPN=C238122, Supplier=JLCPCB
U101: library part "IC REG LINEAR AP7363-33D-13", "Linear LDO Voltage Regulator, 3.3V, 1.5A", Case=TO-252-3, MFR=onsemi, Checked=Yes, MFRN=AP7363-33D-13, SPN=AP7363-33D-13TR-ND, Supplier="Diodes Incorporated"
U102: library part "IC BATT CHG LI-ION BQ24166", "IC Battery Charger, Li-Ion, 1 Cell, 3.7V, 2.5A", Case=24-VFQFN, MFR="Texas Instruments", Checked=Yes, MFRN=BQ24166RGER, SPN=296-48490-2-ND, Supplier=Digi-Key
U103: library part "IC BATT PROT BQ29700DSER", "Battery Protection IC Li-Ion 1Cell", Case=6-WSON, MFR="Texas Instruments", Checked=Yes, MFRN=BQ29700DSER, SPN=C183096, Supplier=JLCPCB
U201: "Generic Description", Case=24-TQFN-EP, MFR="Infineon Technologies", Checked=Yes, MFRN=CYPD3177-24LQXQT, SPN=C5904158, Supplier=JLCPCB
U301: "High-performance and DSP with FPU, Arm Cortex-M7 MCU with 1 Mbyte of Flash memory, 216 MHz CPU, Art Accelerator, L1 cache, SDRAM, TFT", Case=LQFP100, MFR=STMicroelectronics, Checked=Yes, MFRN=STM32F746VGT6, SPN=497-15819-ND, Supplier=Digi-Key
U302: "IC RTC CLOCK/CALENDAR I2C 8SO", Case=8-SOIC, MFR="NXP USA Inc.", Checked=Yes, MFRN=PCF8563T/5,518, SPN=568-6650-2-ND, Supplier=Digi-Key
U501: "RF transceiver module, Bluetooth, WiFi", MFR="Espressif Systems", Case=ESP32-C3-WROOM-02-N4, Checked=Yes, MFRN=ESP32-C3-WROOM-02-N4, SPN=1965-ESP32-C3-WROOM-02-N4TR-ND, Supplier=Digi-Key
X101 X102 X104 X201 X202 X203 X501 X503: "Pin Header 2x1, P2.54", Case=2X1, MFR="XKB Connectivity", MFRN=X6521WV-2x01H-C60D30, Checked=Yes, SPN=C2883961, Supplier=JLCPCB
X103: library part "JST S2B-PH-K-S", "JST PH Connector 2POS R/A THT", Case=JST_S2B-PH-K-S, MFR="JST Sales America Inc.", Checked=Yes, MFRN=S2B-PH-K-S, SPN=C173752, Supplier=JLCPCB
X204: library part "CONN USB 2.0 TYPE C", "USB TYPE-C 3.1, 3A", Case="USB Type C", MFR=HCTL, Checked=Yes, MFRN=HC-TYPE-C-16P-01A-R, SPN=C2997433, Supplier=JLCPCB
X301: "CR1632 Battery Holder", MFR=MYOUNG, MFRN=BS-16-B4AA006-R, Case=CR1632, Checked=Yes, SPN=C964735, Supplier=JLCPCB
X401: library part "CONN SD CARD 10067847-001RLF", "SD card connector, push-push, SMD", Case=?, MFR="Amphenol ICC (FCI)", Checked=Yes, MFRN=10067847-001RLF, SPN=609-3956-2-ND, Supplier=Digi-Key
X402 X502: "Pin Header 4x1, P2.54", Case=4X1, Checked=Yes
Y301: library part X1A0001410002, "Crystal, 32.768Hz, 9pF, 50kOhms", Case=SMD3215-2P, MFR="Seiko Epson", Checked=Yes, MFRN=X1A0001410002, SPN=C1987155, Supplier=JLCPCB
Y302: library part NX8045GB-8.000000MHZ, "Crystal, 8MHz, 8pF, 200Ohms", Case=SMD8045-2P, MFR=NDK, Checked=Yes, MFRN=NX8045GB-8.000000MHZ, SPN=C1985641, Supplier=JLCPCB
Y501: library part STDMUA9-32.768K, "Crystal, 32.768Hz, 9pF, 70kOhms", Case=2-SMD, MFR="NDK America, Inc.", MFRN=STDMUA9-32.768K, SPN=644-STDMUA9-32.768KTR-ND, Supplier=Digi-Key

## Free pads (board coordinates)
  round 6 hole 2.7 unplated mask+0.05: 0(3.5,3.5) 0(3.5,86.5) 0(96.5,3.5) 0(96.5,86.5)

## Via types
v1: diameter 0.6, hole 0.3, Top Layer to Bottom Layer, tented both sides, 106 vias
v2: diameter 0.6, hole 0.3, Top Layer to Bottom Layer, 22 vias

## Nets (pads, with @x,y where several pads share a name; then routed paths per layer and width w, separated by ;. In a path a pad name is that pad's centre, name@x,y a point inside that pad or via, vN(x,y) a via of type N, cw(c..) or ccw(c..) an arc to the next point about the centre after c; other vN are vias at no path point)
+3.3V: C102.2 C303.2 C304.2 C305.2 C306.2 C307.2 C308.2 C309.2 C310.2 C403.2 C501.1 C502.1 FB401.2 J401.5 J401.6 R301.2 R302.2 R303.2 R304.2 R401.2 R402.2 R403.2 R404.2 R405.2 R502.2 R503.2 R506.2 TP101.1 U101.3 U301.6 U301.11 U301.20 U301.21 U301.27 U301.50 U301.75 U301.100 U501.1 X502.1 | length 40.3
  Top Layer w0.2: 50.2,29.5 50.3,29.6 U301.75@51.25,29.6 ; R301.2@56,24.2 v1(56,25.3) ; R302.2@57.6,24.2 v1(57.6,25.3) ; R304.2@59.2,24.2 v1(59.2,25.3) ; R303.2@60.8,24.2 v1(60.8,25.3) ; 65,26.8 U301.100@65,27.85 ; U301.20@66.75,39.1 70.075,39.1 70.875,39.9 C310.2@70.9,39.9 ; U301.21@66.75,39.6 69,39.6 C309.2@69.3,39.9 ; R506.2@83.4,85.8 v1(83.4,86.8) ; R503.2@87.5,85.6 87.5,85.575 87.875,85.2 87.9,85.2 88.5,84.6 90.225,84.6 91.2,85.575 C502.1@91.2,85.6
  Top Layer w0.5: C304.2@49.4,29 49.425,29 49.925,29.5 50.2,29.5 ; 65,26.8 65.5,26.3 C308.2@65.5,25.3 ; C502.1@91.2,85.575 91.2,84.7 92.9,83 U501.1@92.9,81.71 ; C502.1@91.2,85.6 C501.1@91.2,87.2 v1(91.2,88.4)
  Top Layer w0.8: TP101.1@27,44 27.086,44.086 U101.3@27.086,50.95 27.136,50.9 C102.2@29.4,50.9 ; FB401.2@36.8,24.5 C403.2@38.4,24.5
  other v1: 33.7,13.6 35.3,13.6 36.9,13.6 39.4,24.5
"+3.3V SD": C401.2 C402.2 D401.2 FB401.1 X401.4 | length 7.2
  Top Layer w0.3: 31.46,26.04 D401.2@32,26.04 32.54,26.04 32.6,26.1
  Top Layer w0.5: X401.4@29.7,26.275 29.725,26.3 31.2,26.3 31.46,26.04 ; 32.6,26.1 C401.2@33.6,26.1 C402.2@35.2,26.1 FB401.1@36.8,26.1
+3V: C312.2 U302.8 X301.1 | length 30.3
  Top Layer w0.5: U302.8@63.85,16.095 65.105,16.095 65.6,15.6 C312.2@65.6,14.2 65.6,13.2 66,12.8 76.875,12.8 77.525,13.45 88.775,13.45 X301.1@90.4,15.075
+3V3: D201.2 J402.1 R109.1 R110.1 R111.1 R207.2 R208.2 R209.2 R210.2 R212.2 R213.2 R214.2 R215.2 X402.1
+VBAT: C111.2 U102.11 U102.12 X102.1 | length 17.1
  Top Layer w0.2: 25.1,71.9 25.35,72.15 U102.11@26.2,72.15 ; 25.65,71.65 U102.12@26.2,71.65
  Top Layer w0.8: 22.475,70.95 C111.2@24,70.95 24.075,71.025 24.625,71.025 25.3,71.7
  Top Layer w1.5: X102.1@17.14,81 19.375,78.765 19.375,74.05 22.475,70.95
+VBAT_J: R104.2 TP104.1 X102.2 X103.1 | length 22.2
  Top Layer w0.8: 11.85,78.25 12.2,77.9 R104.2@12.2,76.3
  Top Layer w1.5: X103.1@5.2,76.3 7.15,78.25 11.85,78.25 X102.2@14.6,81 9.019,86.581 9.019,87.381 TP104.1@9,87.4
+VBUS: C201.2 C207.2 Q201.7 Q201.8 R201.2 U201.18 X203.1 | length 31.6
  Top Layer w0.2: U201.18@48.875,74.65 49.775,74.65
  Top Layer w0.8: 49.775,74.65 C207.2@50.375,74.65 v1(51.675,74.65) ; Q201.7@52.41,58.352 Q201.7@52.41,58.352 52.411,58.35 R201.2@56.475,58.35 C201.2@58.075,58.35 59.375,58.35 60.275,59.25
  Top Layer w1.5: X203.1@55.175,73.91 60.275,68.81 60.275,59.25
  Bottom Layer w0.8: v1(51.675,74.65) 52.415,73.91 X203.1@55.175,73.91
+VBUS_J: X202.2 X203.2 X204.A4-B9 X204.B4-A9 | length 11.4
  Top Layer w0.5: v1(48.775,81.05) X204.B4-A9@48.775,82.572 ; v1(53.575,81.05) X204.A4-B9@53.575,82.572
  Top Layer w1: v1(53.575,81.05) 55.175,79.45 X203.2@55.175,76.45 X202.2@58.275,76.45